# EAGLE board Sensor8535 - eagle (EAGLE 4.09)
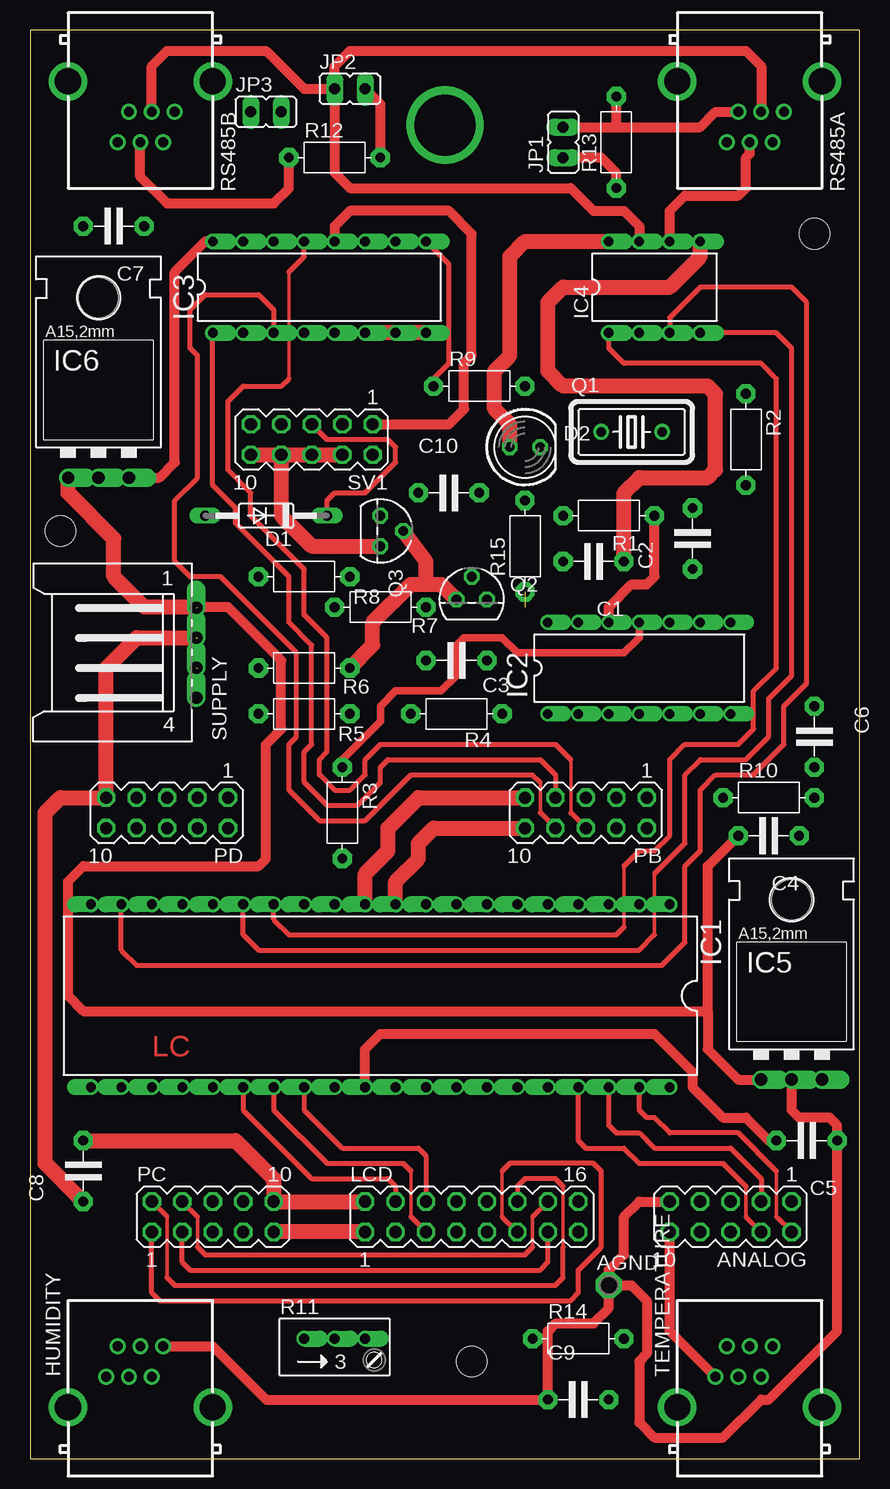
[diagram p0: board, top side]
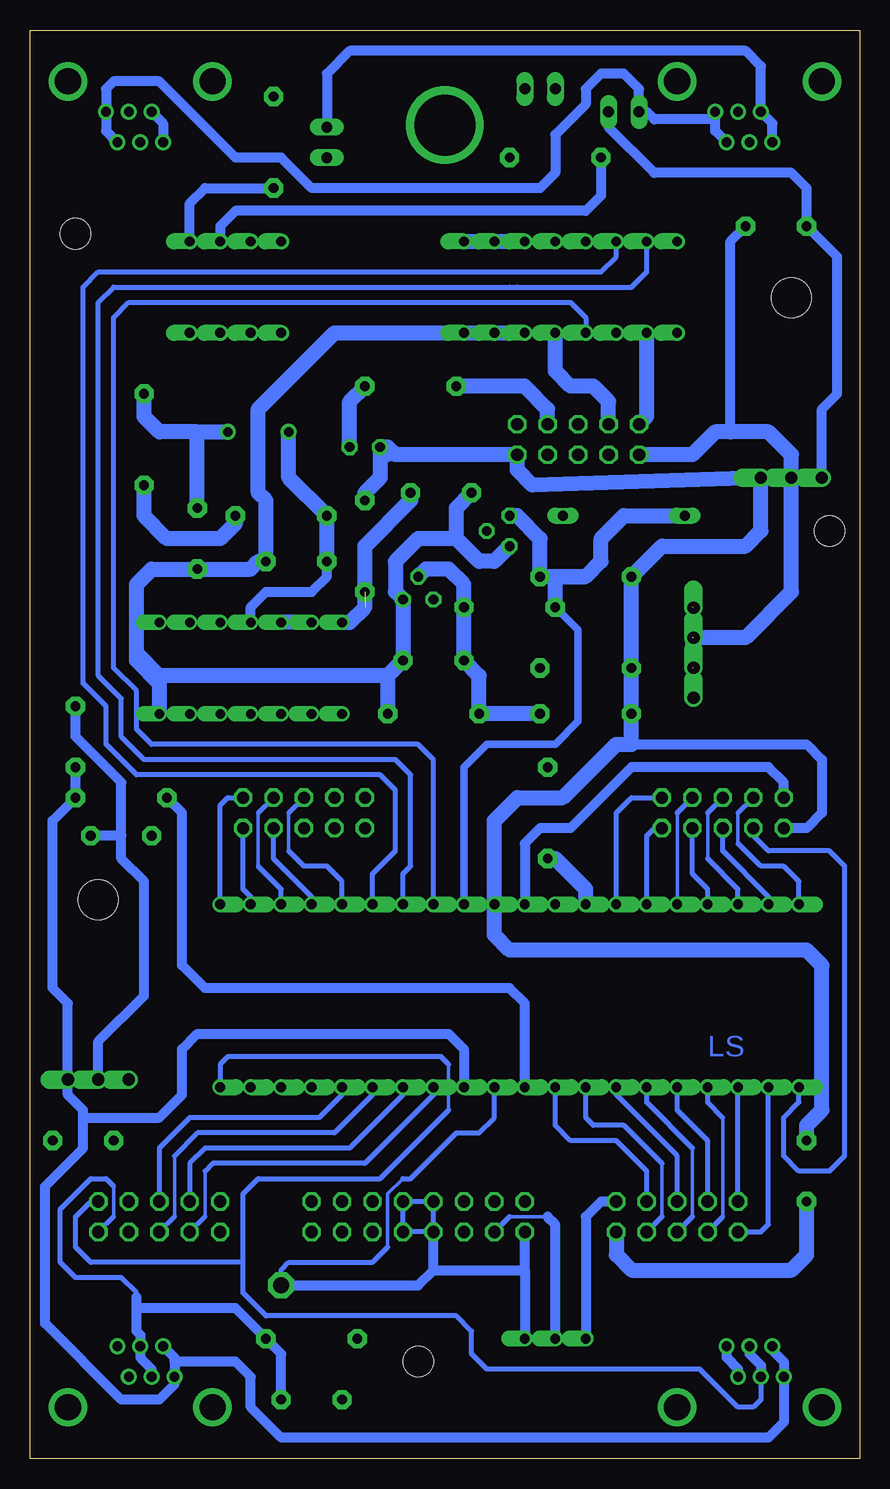
[diagram p1: board, bottom side, seen from below]

Size 69.2 x 119.05 mm. Coordinates in mm from the lower left corner, seen from the top.
Outline: 0,0 69.2,0 69.2,119.05 0,119.05 0,0
Copper layers used: Top, Bottom
Holes 2.54 mm at 2.54,77.31 36.83,8.09 65.4,102.07

## Footprints (pad centres in the part's own frame; a part is rotated, then mirrored left to right if it is on the bottom)
P1-13 = drill 1.321 pad 2.159 octagon: 1 0,0
MA05-2 = drill 1.016 octagon: 1 -5.08,-1.27; 2 -5.08,1.27; 3 -2.54,-1.27; 4 -2.54,1.27; 5 0,-1.27; 6 0,1.27; 7 2.54,-1.27; 8 2.54,1.27; 9 5.08,-1.27; 10 5.08,1.27
C-5 = drill 0.813 pad 1.6 octagon: 1 -2.54,0; 2 2.54,0
DO35-10 = drill 0.813 long: A 5.08,0; C -5.08,0
LED5MM = drill 0.813 octagon: A -1.27,0; K 1.27,0
RJ11V = drill 0.813 pad 1.27 round: 1 -5.08,0.635; 2 -2.54,-0.318; 3 -5.08,-1.27; 4 -2.54,-2.223; 5 -5.08,-3.175; 6 -2.54,-4.128 | drill 2.184 pad 2.54 round: P$1 -7.62,3.81; P$3 -7.62,-8.255
DIL40 = drill 0.813 offset: 1 -24.13,-7.62; 2 -21.59,-7.62; 3 -19.05,-7.62; 4 -16.51,-7.62; 5 -13.97,-7.62; 6 -11.43,-7.62; 7 -8.89,-7.62; 8 -6.35,-7.62; 9 -3.81,-7.62; 10 -1.27,-7.62; 11 1.27,-7.62; 12 3.81,-7.62; 13 6.35,-7.62; 14 8.89,-7.62; 15 11.43,-7.62; 16 13.97,-7.62; 17 16.51,-7.62; 18 19.05,-7.62; 19 21.59,-7.62; 20 24.13,-7.62; 21 24.13,7.62; 22 21.59,7.62; 23 19.05,7.62; 24 16.51,7.62; 25 13.97,7.62; 26 11.43,7.62; 27 8.89,7.62; 28 6.35,7.62; 29 3.81,7.62; 30 1.27,7.62; 31 -1.27,7.62; 32 -3.81,7.62; 33 -6.35,7.62; 34 -8.89,7.62; 35 -11.43,7.62; 36 -13.97,7.62; 37 -16.51,7.62; 38 -19.05,7.62; 39 -21.59,7.62; 40 -24.13,7.62
DIL14 = drill 0.8 offset: 1 -7.62,-3.81; 2 -5.08,-3.81; 3 -2.54,-3.81; 4 0,-3.81; 5 2.54,-3.81; 6 5.08,-3.81; 7 7.62,-3.81; 8 7.62,3.81; 9 5.08,3.81; 10 2.54,3.81; 11 0,3.81; 12 -2.54,3.81; 13 -5.08,3.81; 14 -7.62,3.81
DIL16 = drill 0.813 offset: 1 -8.89,-3.81; 2 -6.35,-3.81; 3 -3.81,-3.81; 4 -1.27,-3.81; 5 1.27,-3.81; 6 3.81,-3.81; 7 6.35,-3.81; 8 8.89,-3.81; 9 8.89,3.81; 10 6.35,3.81; 11 3.81,3.81; 12 1.27,3.81; 13 -1.27,3.81; 14 -3.81,3.81; 15 -6.35,3.81; 16 -8.89,3.81
DIL08 = drill 0.813 offset: 1 -3.81,-3.81; 2 -1.27,-3.81; 3 1.27,-3.81; 4 3.81,-3.81; 5 3.81,3.81; 6 1.27,3.81; 7 -1.27,3.81; 8 -3.81,3.81
78XXL = drill 1.016 offset: GND 0,-3.81; IN -2.54,-3.81; OUT 2.54,-3.81 | hole 3.302: 0,11.176
JP1 = drill 0.914 long: 1 0,-1.27; 2 0,1.27
MA08-2 = drill 1.016 octagon: 1 -8.89,-1.27; 2 -8.89,1.27; 3 -6.35,-1.27; 4 -6.35,1.27; 5 -3.81,-1.27; 6 -3.81,1.27; 7 -1.27,-1.27; 8 -1.27,1.27; 9 1.27,-1.27; 10 1.27,1.27; 11 3.81,-1.27; 12 3.81,1.27; 13 6.35,-1.27; 14 6.35,1.27; 15 8.89,-1.27; 16 8.89,1.27
HC18U-V = drill 0.813 round: 1 -2.54,0; 2 2.54,0
TO92 = drill 0.813 octagon: 1 1.27,0; 2 0,1.905; 3 -1.27,0
R-7,5 = drill 0.813 pad 1.6 octagon: 1 -3.81,0; 2 3.81,0
RJ9W = drill 0.813 offset: A 2.54,0.635; E -2.54,0.635; S 0,0.635
L04P = drill 1.016 offset: 1 3.75,-6.25; 2 1.25,-6.25; 3 -1.25,-6.25; 4 -3.75,-6.25

## Placement (x,y rotation side)
AGND  P1-13  [P1-13]  48.26,14.44 0 top
ANALOG  [MA05-2]  58.42,20.16 180 top
C1  27pF  [C-5]  46.99,74.77 180 top
C2  150pF  [C-5]  55.24,76.67 90 top
C3  100nF  [C-5]  35.56,66.51 180 top
C4  220nF  [C-5]  61.59,51.91 180 top
C5  220nF  [C-5]  64.77,26.51 180 top
C6  100nF  [C-5]  65.4,60.16 270 top
C7  220nF  [C-5]  6.98,102.7 180 top
C8  470nF  [C-5]  4.44,23.96 90 top
C9  470nF  [C-5]  45.72,4.92 0 top
C10  470nF  [C-5]  34.92,80.48 0 top
D1  1N4148  [DO35-10]  19.68,78.58 180 top
D2  [LED5MM]  41.27,84.29 0 top
HUMIDITY  RJ11V  [RJ11V]  6.98,11.9 90 top
IC1  AT90S8535P  [DIL40]  29.2,38.57 180 top
IC2  74AS00N  [DIL14]  50.8,65.88 0 top
IC3  4053N  [DIL16]  24.12,97.62 0 top
IC4  MAX481CPA  [DIL08]  52.07,97.62 0 top
IC5  LM340T05  [78XXL]  63.5,35.4 0 top
IC6  LM340T05  [78XXL]  5.71,85.56 0 top
JP1  [JP1]  44.45,109.69 0 top
JP2  [JP1]  26.66,114.14 270 top
JP3  [JP1]  19.68,112.23 270 top
LCD  [MA08-2]  36.83,20.16 0 top
PB  [MA05-2]  46.35,53.81 180 top
PC  [MA05-2]  15.23,20.16 0 top
PD  [MA05-2]  11.43,53.81 180 top
Q1  4MHz  [HC18U-V]  50.16,85.56 0 top
Q2  BC337  [TO92]  36.83,71.59 0 top
Q3  BC337  [TO92]  29.2,77.31 270 top
R1  82k  [R-7,5]  48.26,78.58 180 top
R2  2k  [R-7,5]  59.69,84.92 270 top
R3  100  [R-7,5]  26.03,53.81 270 top
R4  6.8k  [R-7,5]  35.56,62.06 0 top
R5  43k  [R-7,5]  22.86,62.06 180 top
R6  10k  [R-7,5]  22.86,65.88 180 top
R7  1M  [R-7,5]  29.2,70.95 0 top
R8  10k  [R-7,5]  22.86,73.5 180 top
R9  150  [R-7,5]  37.46,89.37 0 top
R10  33k  [R-7,5]  61.59,55.08 0 top
R11  TRIM_EU-RJ9W  [RJ9W]  25.39,9.36 0 top
R12  120  [R-7,5]  25.39,108.42 0 top
R13  100  [R-7,5]  48.89,109.69 90 top
R14  [R-7,5]  45.72,10 0 top
R15  120  [R-7,5]  41.27,76.04 90 top
RS485A  [RJ11V]  62.23,107.15 270 top
RS485B  RJ11V  [RJ11V]  11.43,107.15 270 top
SUPPLY  [L04P]  7.62,67.15 90 top
SV1  ISP  [MA05-2]  23.49,84.92 180 top
TEMPERATURE  RJ11V  [RJ11V]  57.78,11.9 90 top

## Library data of the parts
AGND = testpad
ANALOG LCD PB PC PD SV1 = con-lstb
C1-C10 R1-R10 R12-R15 = discrete
D1 = diode
D2 = led
HUMIDITY RS485A RS485B TEMPERATURE = con-rj
IC1 = atmel
IC2 = 74xx-eu
IC3 = 40xx
IC4 = maxim
IC5 IC6 = v-reg
JP1-JP3 = jumper
Q1 = crystal
Q2 Q3 = transistor-npn
R11 = pot
SUPPLY = con-amp-mt

## Nets
(MISO)PB6: IC1.7 IC3.15
(MOSI)PB5: IC1.6 IC3.14
(SCK)PB7: IC1.8 IC3.4
+5V: C8.2 D2.A IC1.10 IC3.16 IC4.8 IC6.OUT LCD.2 PB.10 PC.10 PD.10 R5.2 R6.2 R8.2 R11.E R15.2 SV1.2
A: IC4.6 R12.1 RS485A.4 RS485B.4
ADC0: ANALOG.1 HUMIDITY.3 HUMIDITY.4 IC1.40
ADC1: ANALOG.2 C9.2 IC1.39 R14.2 TEMPERATURE.3 TEMPERATURE.4
ADC2: ANALOG.3 IC1.38
ADC3: ANALOG.4 IC1.37
ADC4: ANALOG.5 IC1.36
ADC5: ANALOG.6 IC1.35
ADC6: ANALOG.7 IC1.34
ADC7: ANALOG.8 IC1.33
AREF: ANALOG.10 C6.2 HUMIDITY.1 HUMIDITY.2 IC1.32 IC5.OUT R10.2 TEMPERATURE.1 TEMPERATURE.2
AVCC: C5.2 IC1.30 R10.1
B: IC4.7 JP2.1 RS485A.3 RS485B.3
CLK: IC1.13 R3.2
LED_ENABLE: IC3.9 IC3.10 IC3.11 R9.1 SV1.3
MISO: IC3.2 SV1.9
MOSI: IC3.12 SV1.1
N$1: IC2.12 IC2.13 R1.1 R2.2
N$3: LCD.3 R11.S
N$4: C2.2 Q1.2 R2.1
N$5: D2.K R9.2
N$6: C1.2 IC2.11 Q1.1 R1.2 R3.1
N$7: Q2.3 Q3.2 R6.1
N$9: C3.2 Q2.2 R4.1 R5.1 R7.2
N$11: JP2.2 R12.2
P-RESET: D1.C SV1.5
PB0: IC1.1 PB.1
PB1: IC1.2 PB.2
PB2: IC1.3 PB.3
PB3: IC1.4 PB.4
PB4: IC1.5 PB.5
PB5: IC3.13 PB.6
PB6: IC3.1 PB.7
PB7: IC3.3 PB.8
PC0: IC1.22 LCD.11 PC.1
PC1: IC1.23 LCD.12 PC.2
PC2: IC1.24 LCD.13 PC.3
PC3: IC1.25 LCD.14 PC.4
PC4: IC1.26 LCD.4 PC.5
PC5: IC1.27 LCD.5 PC.6
PC6: IC1.28 LCD.6 PC.7
PC7: IC1.29 PC.8
PD0: IC1.14 IC4.1 PD.1
PD1: IC1.15 IC4.4 PD.2
PD2: IC1.16 PD.3
PD3: IC1.17 PD.4
PD4: IC1.18 PD.5
PD5: IC1.19 IC4.2 IC4.3 PD.6
PD6: IC1.20 PD.7
PD7: IC1.21 PD.8
PE: AGND.1 ANALOG.9 C1.1 C2.1 C3.1 C4.1 C5.1 C6.1 C7.1 C8.1 C9.1 C10.1 HUMIDITY.5 HUMIDITY.6 IC1.11 IC1.31 IC2.7 IC3.6 IC3.7 IC3.8 IC4.5 IC5.GND IC6.GND JP1.1 LCD.1 LCD.7 LCD.8 LCD.9 LCD.10 PB.9 PC.9 PD.9 Q2.1 Q3.1 R4.2 R11.A R13.1 R14.1 SUPPLY.2 SUPPLY.3 SV1.4 SV1.6 SV1.8 SV1.10
RST: D1.A IC1.9 Q3.3 R7.1 R8.1
RSVCC: JP3.1 RS485A.1 RS485A.2 RS485B.1 RS485B.2
RTN: JP1.2 R13.2 RS485A.5 RS485A.6 RS485B.5 RS485B.6
SCK: IC3.5 SV1.7
VCC: C4.2 C7.2 IC5.IN IC6.IN JP3.2 SUPPLY.1
VCUT: C10.2 IC2.14 R15.1

## Tracks (layer width: path | path; a pad name or v marks a point on that pad's centre or on a via)
(MISO)PB6
  Bottom 0.406: IC1.7 38.1,48.73 37.46,49.37 37.46,56.98 38.73,58.26 59.69,58.26 61.59,60.16 61.59,63.34 63.5,65.24 63.5,96.36 62.23,97.62 29.2,97.62 | 29.2,97.62 28.57,97.62 | 29.2,97.62 19.04,97.62 17.77,98.89 IC3.15
(MOSI)PB5
  Bottom 0.406: IC1.6 40.64,48.73 38.73,50.64 38.73,55.72 40,56.98 60.32,56.98 62.86,59.52 62.86,62.7 64.77,64.61 64.77,97.62 63.5,98.89 21.59,98.89 20.32,100.17 IC3.14
(SCK)PB7
  Bottom 0.406: IC1.8 35.56,58.26 36.83,59.52 59.05,59.52 60.32,60.8 60.32,63.97 62.23,65.88 62.23,95.09 60.96,96.36 24.12,96.36 22.86,95.09 IC3.4
+5V  (1 unrouted)
  Top 0.813: IC6.OUT 10.79,81.75 12.06,83.02 12.06,98.89 14.6,101.44 IC3.16
  Top 1.27: PB.10 33.65,52.54 32.38,51.27 32.38,50 30.47,48.09 IC1.10 | D2.A 40,86.2 38.73,87.47 38.73,90.64 40,91.91 40,100.17 41.27,101.44 IC4.8 | LCD.2 PC.10 20.32,23.33 17.14,26.51 C8.2
  Bottom 0.813: R11.E 22.86,20.16 21.59,21.43 PC.10 | PD.10 4.44,52.54 3.17,53.81 3.17,58.26 4.44,59.52 19.04,59.52
  Bottom 1.27: R5.2 R6.2 | R6.2 R8.2 16.5,76.03 9.52,76.03 8.25,77.31 IC6.OUT 27.3,81.12 28.57,82.38 SV1.2 38.73,83.66 39.37,84.29 D2.A | R5.2 R6.2 | C8.2 4.44,27.78 3.17,29.05 3.17,41.11 4.44,42.38 29.2,42.38 30.47,43.65 IC1.10 30.47,53.18 28.57,55.08 24.76,55.08 20.32,59.52 19.04,59.52 R5.2 | 40,83.66 40,81.75 | D2.A 40,83.66 | 40,83.66 39.37,83.66 | D2.A 40,81.75 | 40,81.75 41.27,80.48 R15.2
A
  Top 0.813: RS485B.4 9.2,106.83 11.43,104.61 20.32,104.61 21.59,105.88 R12.1 | RS485A.4 60,108.74 59.69,108.42 59.69,105.88 59.05,105.25 54.61,105.25 53.34,103.97 IC4.6
  Bottom 0.813: R12.1 21.59,105.25 22.86,103.97 52.07,103.97 53.34,102.7 IC4.6
ADC0
  Bottom 0.305: 34.29,29.05 34.29,32.86
  Bottom 0.406: ANALOG.1 64.13,21.43 65.4,20.16 65.4,17.62 64.13,16.35 51.43,16.35 | 51.43,16.35 51.43,22.06 50.16,23.33 40,23.33 34.29,29.05 | 34.29,32.86 34.92,33.49 52.7,33.49 53.34,32.86 IC1.40 | HUMIDITY.3 8.25,4.92 8.88,4.28 10.15,4.28 13.33,7.46 31.11,7.46 32.38,8.73 32.38,10.63 33.65,11.9 49.53,11.9 51.43,13.81 51.43,16.35
  Bottom 0.813: HUMIDITY.3 8.25,7.77 9.2,8.73 HUMIDITY.4
ADC1
  Top 0.305: 62.23,20.16 62.23,23.96
  Top 0.406: ANALOG.2 62.23,20.16 | 62.23,23.96 59.05,27.14 53.34,27.14 52.07,28.41 51.43,28.41 50.8,29.05 IC1.39
  Bottom 0.305: 62.23,22.7 62.23,20.16
  Bottom 0.406: 62.23,20.16 ANALOG.2 | 62.23,22.7 62.86,23.33 64.13,23.33 66.67,20.79 66.67,16.35 65.4,15.08 61.59,15.08 60.32,13.81 60.32,13.49 60.32,12.54 60.32,10.63
  Bottom 0.813: C9.2 48.26,8.73 R14.2 52.07,12.54 60.32,12.54 | 60.32,13.49 60.32,10.63 60,10.31 TEMPERATURE.4 60,8.41 59.05,7.46 TEMPERATURE.3
ADC2
  Top 0.406: ANALOG.3 60.96,23.33 58.42,25.87 52.07,25.87 50.8,27.14 48.89,27.14 48.26,27.78 IC1.38
ADC3
  Top 0.305: 59.69,22.7 59.69,20.16
  Top 0.406: 59.69,20.16 ANALOG.4 | 59.69,22.7 57.78,24.6 50.8,24.6 49.53,25.87 46.35,25.87 45.72,26.51 IC1.37
ADC4
  Bottom 0.406: ANALOG.5 58.42,25.87 55.88,28.41 45.08,28.41 43.18,30.32 IC1.36
ADC5
  Bottom 0.305: 57.15,25.23 57.15,20.16
  Bottom 0.406: 57.15,20.16 ANALOG.6 | 57.15,25.23 55.24,27.14 43.81,27.14 40.64,30.32 IC1.35
ADC6
  Bottom 0.406: ANALOG.7 55.88,24.6 54.61,25.87 42.54,25.87 38.1,30.32 IC1.34
ADC7
  Bottom 0.305: 54.61,23.96 54.61,20.16
  Bottom 0.406: 54.61,20.16 ANALOG.8 | 54.61,23.96 53.97,24.6 41.27,24.6 35.56,30.32 IC1.33
AREF
  Top 0.813: ANALOG.10 53.34,10.63 TEMPERATURE.1
  Bottom 0.813: 64.77,28.41 58.42,28.41 56.51,30.32 56.51,34.12 55.24,35.4 34.29,35.4 33.02,34.12 IC1.32 | HUMIDITY.2 7.3,9.04 6.35,8.09 HUMIDITY.1 6.35,3.01 7.62,1.74 48.26,1.74 50.8,4.28 50.8,6.82 52.07,8.09 57.15,8.09 | 57.15,8.09 TEMPERATURE.1 57.15,6.19 58.42,4.92 61.59,4.92 67.94,11.27 67.94,22.7 64.77,25.87 64.77,28.41 | 57.15,8.09 57.15,8.41 TEMPERATURE.2 | 64.77,28.41 64.77,29.05 66.03,30.32 IC5.OUT 66.03,37.94 67.31,39.2 67.31,53.18 R10.2 C6.2
AVCC
  Top 0.813: C5.2 61.59,26.51 59.69,28.41 57.78,28.41 55.24,30.95 55.24,32.22 52.07,35.4 29.2,35.4 27.93,34.12 IC1.30
  Bottom 0.813: 56.51,49.37 56.51,41.11 54.61,39.2 29.2,39.2 27.93,37.94 IC1.30 | 56.51,49.37 56.51,50.64 | 56.51,49.37 56.51,53.81 R10.1
B
  Top 0.813: RS485B.3 10.15,116.04 11.43,117.31 19.68,117.31 22.86,114.14 JP2.1 | JP2.1 25.39,107.15 26.66,105.88 45.08,105.88 46.99,103.97 49.53,103.97 50.8,102.7 IC4.7 | JP2.1 25.39,116.04 26.66,117.31 59.69,117.31 60.96,116.04 RS485A.3
CLK
  Bottom 1.27: IC1.13 22.86,47.46 25.39,50 R3.2
LED_ENABLE
  Top 0.406: R9.1 33.65,90 34.92,91.28 34.92,99.53 IC3.9 IC3.11
  Bottom 1.27: R9.1 27.93,89.37 26.03,87.47 SV1.3 | IC3.11 IC3.10 IC3.9
MISO
  Bottom 1.27: SV1.9 17.77,86.83 IC3.2
MOSI
  Top 0.813: SV1.1 34.92,86.2 36.19,87.47 36.19,91.28 36.83,91.91 36.83,102.07 34.92,103.97 26.66,103.97 25.39,102.7 IC3.12
N$1
  Top 0.813: IC2.12 48.26,70.95 50.16,72.86 51.43,72.86 52.07,73.5 R1.1
  Bottom 1.27: R1.1 52.07,77.94 53.34,76.67 57.78,76.67 59.69,78.58 R2.2 | IC2.13 IC2.12
N$2  (via drill 5.08 pad 6.45)
  other vias: 34.6,111.12
N$3
  Bottom 0.305: 26.03,20.16 29.2,20.16
  Bottom 0.406: 29.2,20.16 LCD.3
  Bottom 0.813: R11.S 25.39,19.52 26.03,20.16
N$4
  Bottom 1.27: 55.24,85.56 Q1.2 | R2.1 59.69,86.83 58.42,85.56 55.24,85.56 | C2.2 55.24,85.56
N$5
  Bottom 1.27: D2.K 42.54,88.1 R9.2
N$6
  Top 0.61: R3.1 26.03,58.26 29.2,61.43 29.2,62.7 30.47,63.97 34.29,63.97 35.56,65.24 35.56,67.15 35.56,67.78 36.19,68.41 39.37,68.41 40.64,67.15 49.53,67.15 50.8,68.41 IC2.11
  Bottom 0.813: IC2.11 50.8,70.95 49.53,72.22 45.72,72.22 44.45,73.5 C1.2
  Bottom 1.27: R1.2 C1.2 R1.2 | Q1.1 47.62,81.75 R1.2
N$7
  Top 1.27: R6.1 28.57,67.78 28.57,69.69 31.75,72.86 33.02,72.86 | 33.02,72.86 33.02,74.77 Q3.2 | 33.02,72.86 34.29,72.86 Q2.3
N$9
  Bottom 1.27: R5.1 R4.1 31.75,65.24 C3.2 R7.2 33.02,72.86 34.29,74.13 36.19,74.13 Q2.2
N$11
  Top 0.813: R12.2 29.2,112.86 JP2.2
P-RESET
  Top 0.406: D1.C 24.76,79.84 25.39,80.48 27.93,80.48 30.47,83.02 30.47,84.29 29.84,84.92 24.76,84.92 SV1.5
PB0
  Bottom 0.406: PB.1 52.7,55.08 53.34,54.45 IC1.1
PB1
  Bottom 0.406: IC1.2 50.8,46.83 51.43,47.46 PB.2
PB2
  Bottom 0.305: 50.16,49.37 50.16,53.81
  Bottom 0.406: 50.16,53.81 PB.3 | 50.16,49.37 48.26,47.46 IC1.3
PB3
  Bottom 0.406: PB.4 48.89,50 45.72,46.83 IC1.4
PB4
  Bottom 0.305: 47.62,50.64 47.62,53.81
  Bottom 0.406: 47.62,53.81 PB.5 | 47.62,50.64 46.35,49.37 44.45,49.37 43.18,48.09 IC1.5
PB5
  Top 0.305: 45.08,58.26 45.08,53.81 | 21.59,90 21.59,98.89
  Top 0.406: 45.08,53.81 PB.6 | 45.08,58.26 43.81,59.52 29.84,59.52 | 29.84,59.52 31.11,59.52 | 29.84,59.52 29.2,59.52 27.93,58.26 27.93,56.98 26.66,55.72 25.39,55.72 24.12,56.98 24.12,58.26 24.76,58.89 24.76,68.41 22.86,70.32 22.86,74.13 18.41,78.58 18.41,80.48 16.5,82.38 16.5,88.1 17.77,89.37 20.95,89.37 21.59,90 | 21.59,98.89 22.86,100.17 IC3.13
PB6
  Top 0.406: PB.7 43.81,56.98 42.54,58.26 29.84,58.26 29.2,57.62 29.2,56.35 27.3,54.45 24.76,54.45 22.86,56.35 22.86,58.89 23.49,59.52 23.49,67.78 21.59,69.69 21.59,73.5 17.14,77.94 17.14,79.21 15.23,81.12 IC3.1
PB7
  Top 0.305: 42.54,56.35 42.54,53.81
  Top 0.406: 42.54,53.81 PB.8 | 42.54,56.35 41.91,56.98 31.75,56.98 27.93,53.18 24.12,53.18 21.59,55.72 21.59,59.52 22.22,60.16 22.22,67.15 15.87,73.5 13.33,73.5 12.06,74.77 12.06,79.84 13.96,81.75 13.96,91.91 13.33,92.55 13.33,95.72 14.6,96.99 19.04,96.99 20.32,95.72 IC3.3
PC0
  Top 0.305: 39.37,23.96 39.37,20.16
  Top 0.406: PC.1 10.15,13.81 10.79,13.17 45.08,13.17 45.72,13.81 45.72,15.71 47.62,17.62 47.62,23.96 46.99,24.6 40,24.6 39.37,23.96 | 39.37,20.16 LCD.11
  Bottom 0.406: PC.1 8.25,18.89 7.62,19.52 IC1.22
PC1
  Top 0.305: 44.45,17.62 44.45,22.7 | 11.43,15.08 11.43,20.16
  Top 0.406: LCD.12 40.64,22.7 41.27,23.33 43.81,23.33 44.45,22.7 | 11.43,15.08 12.06,14.44 43.81,14.44 44.45,15.08 44.45,17.62 | 11.43,20.16 PC.2
  Bottom 0.406: PC.2 IC1.23
PC2
  Top 0.406: LCD.13 43.18,16.35 42.54,15.71 13.33,15.71 12.7,16.35 PC.3
  Bottom 0.305: 11.43,20.16 11.43,28.41
  Bottom 0.406: PC.3 11.43,20.16 | 11.43,28.41 12.7,29.68 IC1.24
PC3
  Top 0.305: 41.91,17.62 41.91,20.16 | 13.96,20.16 13.96,17.62
  Top 0.406: 41.91,20.16 LCD.14 | 41.91,17.62 41.27,16.98 14.6,16.98 13.96,17.62 | PC.4 13.96,20.16
  Bottom 0.406: PC.4 12.7,26.51 15.23,29.05 IC1.25
PC4
  Top 0.406: LCD.4 30.47,22.7 29.84,23.33 23.49,23.33 17.77,29.05 IC1.26
  Bottom 0.305: 13.96,20.16 13.96,25.87
  Bottom 0.406: PC.5 13.96,20.16 | 13.96,25.87 17.77,29.68 IC1.26
PC5
  Top 0.305: 31.75,23.96 31.75,20.16
  Top 0.406: 31.75,20.16 LCD.5 | 31.75,23.96 31.11,24.6 24.76,24.6 20.32,29.05 IC1.27
  Bottom 0.406: PC.6 15.23,25.23 20.32,30.32 IC1.27
PC6
  Top 0.406: LCD.6 33.02,25.23 32.38,25.87 26.03,25.87 22.86,29.05 IC1.28
  Bottom 0.305: 16.5,20.16 16.5,24.6
  Bottom 0.406: PC.7 16.5,20.16 | 16.5,24.6 19.68,27.78 22.22,27.78 22.86,28.41 IC1.28
PC7
  Bottom 0.406: PC.8 17.77,23.96 20.32,26.51 24.12,26.51 25.39,27.78 IC1.29
PD0
  Top 0.305: 49.53,44.28 49.53,49.37
  Top 0.406: IC4.1 48.26,92.55 49.53,91.28 60.96,91.28 62.23,90 62.23,65.88 60.32,63.97 60.32,60.8 59.05,59.52 54.61,59.52 53.34,58.26 53.34,51.91 52.07,50.64 50.8,50.64 49.53,49.37 | 49.53,44.28 48.89,43.65 21.59,43.65 20.32,44.92 IC1.14
  Bottom 0.406: PD.1 19.04,55.08 20.32,53.81 IC1.14
PD1
  Top 0.305: 52.07,43.65 52.07,48.73
  Top 0.406: IC4.4 62.23,93.81 63.5,92.55 63.5,65.24 61.59,63.34 61.59,60.16 59.69,58.26 55.88,58.26 54.61,56.98 54.61,51.27 52.07,48.73 | 52.07,43.65 50.8,42.38 19.04,42.38 17.77,43.65 IC1.15
  Bottom 0.406: IC1.15 17.77,51.91 17.14,52.54 PD.2
PD2
  Bottom 0.305: IC1.16 15.23,53.81
  Bottom 0.406: 15.23,53.81 PD.3
PD3
  Bottom 0.406: IC1.17 12.7,47.46 13.96,48.73 PD.4
PD4
  Bottom 0.305: 12.7,50 12.7,53.81
  Bottom 0.406: 12.7,53.81 PD.5 | 12.7,50 10.15,47.46 IC1.18
PD5
  Top 0.406: IC4.2 IC4.3 53.34,95.09 55.88,97.62 63.5,97.62 64.77,96.36 64.77,64.61 62.86,62.7 62.86,59.52 60.32,56.98 57.15,56.98 55.88,55.72 55.88,50.64 54.61,49.37 54.61,43.02 52.7,41.11 8.88,41.11 7.62,42.38 IC1.19
  Bottom 0.406: PD.6 11.43,50.64 7.62,46.83 IC1.19
PD6
  Bottom 0.305: 10.15,51.27 10.15,53.81
  Bottom 0.406: 10.15,53.81 PD.7 | 10.15,51.27 8.25,49.37 6.35,49.37 5.08,48.09 IC1.20
PD7
  Bottom 0.406: PD.8 8.88,51.91 7.62,50.64 2.54,50.64 1.26,49.37 1.26,25.23 2.54,23.96 5.08,23.96 6.35,25.23 6.35,28.41 5.08,29.68 IC1.21
PE  (4 unrouted)
  Top 0.813: IC5.GND 63.5,29.05 64.13,28.41 66.67,28.41 67.31,27.78 C5.1 67.31,10.63 61.59,4.92 60.96,4.92 57.78,1.74 52.07,1.74 50.8,3.01 50.8,8.09 51.43,8.73 51.43,13.17 50.16,14.44 AGND.1 | 43.18,10 C9.1 19.68,4.92 15.23,9.36 HUMIDITY.6 | 43.18,10 R14.1 | AGND.1 48.26,15.71 49.53,16.98 49.53,20.16 50.8,21.43 ANALOG.9 | 43.18,10 43.18,10.63 43.81,11.27 46.99,11.27 48.26,12.54 AGND.1 | JP1.1 47.62,108.42 48.89,107.15 R13.1
  Top 1.27: SV1.4 SV1.6 SV1.8 | SV1.10 SV1.8 | IC3.8 IC3.6 | Q3.1 23.49,76.03 20.95,78.58 SV1.8 | PB.9 32.38,55.08 29.84,52.54 29.84,50.64 27.93,48.73 IC1.11 | IC4.5 55.88,100.17 53.34,97.62 44.45,97.62 43.18,96.36 43.18,90.64 44.45,89.37 56.51,89.37 57.15,88.73 57.15,82.38 56.51,81.75 50.8,81.75 49.53,80.48 C1.1 | LCD.1 PC.9 | C8.1 1.26,24.6 1.26,53.81 2.54,55.08 PD.9 6.35,65.88 8.88,68.41 13.96,68.41
  Bottom 0.305: 38.1,23.33 39.37,22.06 39.37,17.62
  Bottom 0.406: IC1.31 30.47,28.41 31.75,27.14 33.65,27.14 37.46,23.33 38.1,23.33 | 39.37,17.62 40.64,16.35 47.62,16.35 48.26,15.71 AGND.1 | LCD.7 LCD.9 LCD.10 LCD.8 LCD.7
  Bottom 0.813: 35.56,15.71 27.93,15.71 | 35.56,15.71 LCD.7 | C6.1 65.4,60.16 61.59,56.35 61.59,51.91 | 61.59,51.91 61.59,50 59.69,48.09 59.69,38.57 63.5,34.76 IC5.GND | HUMIDITY.5 10.15,7.46 11.11,8.41 HUMIDITY.6 | 27.93,15.71 LCD.1 | 27.93,15.71 R11.A | 61.59,51.91 C4.1 | 10.79,85.56 10.79,101.44 C7.1 | IC1.11 27.93,51.27 26.66,52.54 24.12,52.54 19.04,57.62 7.62,57.62 6.35,56.35 PD.9 | AGND.1 36.83,14.44 35.56,15.71 | R13.1 54.61,105.88 55.88,104.61 IC4.5
  Bottom 1.27: 39.37,65.24 R4.2 | 39.37,65.24 C3.1 Q2.1 38.73,72.22 38.73,74.77 36.83,76.67 33.65,76.67 | 33.65,76.67 31.75,74.77 30.47,74.77 Q3.1 | IC3.6 IC3.7 IC3.8 43.81,93.81 50.16,87.47 50.16,80.48 49.53,79.84 C1.1 50.16,74.77 50.8,74.13 C2.1 59.05,74.13 60.32,72.86 60.32,67.15 | 13.96,65.88 13.96,68.41 9.52,68.41 5.71,72.22 IC6.GND 5.71,83.66 7.62,85.56 10.79,85.56 12.06,85.56 13.96,83.66 SV1.10 | 60.32,66.51 60.32,67.15 | 58.42,64.61 IC2.7 | 58.42,65.24 58.42,64.61 | 39.37,65.24 58.42,65.24 | 58.42,65.24 60.32,66.51 | 58.42,64.61 60.32,66.51 | 58.42,65.24 60.32,67.15 | C8.1 4.44,16.98 5.71,15.71 19.04,15.71 20.32,16.98 PC.9 | C10.1 33.65,79.21 33.65,76.67
RST
  Bottom 0.61: IC1.9 33.02,57.62 31.11,59.52 25.39,59.52 23.49,61.43 23.49,69.05 R7.1
  Bottom 1.27: R7.1 25.39,73.5 22.86,73.5 | D1.A 19.68,78.58 21.59,76.67 21.59,74.77 22.86,73.5 | 22.86,73.5 R8.1 26.66,76.67 28.57,78.58 Q3.3
RSVCC
  Bottom 0.813: 12.06,111.59 12.06,110.64 RS485B.2 | 12.06,111.59 RS485B.1 | RS485A.2 62.86,110.64 RS485A.1 62.86,114.14 62.23,114.77 58.42,114.77 52.07,108.42 48.26,108.42 45.72,105.88 26.66,105.88 25.39,107.15 25.39,110.33 22.86,112.86 22.86,114.14 21.59,115.41 19.68,115.41 18.41,114.14 JP3.1 17.77,112.23 17.14,111.59 12.06,111.59
RTN
  Top 0.813: JP1.2 48.89,110.96 | 48.89,110.96 R13.2 | RS485A.5 57.15,112.23 55.88,110.96 48.89,110.96
  Bottom 0.813: RS485B.6 7.3,111.28 RS485B.5 8.25,116.04 9.52,117.31 42.54,117.31 44.45,115.41 JP1.2 | RS485A.6 58.1,111.28 RS485A.5
SCK
  Bottom 1.27: IC3.5 25.39,90.64 24.12,89.37 22.22,89.37 20.95,88.1 SV1.7
VCC  (1 unrouted)
  Top 0.813: 56.51,37.3 4.44,37.3 3.17,38.57 3.17,48.09 4.44,49.37 19.04,49.37 19.68,50 19.68,59.52 20.95,60.8 20.95,66.51 16.5,70.95 13.96,70.95 | IC5.IN 59.05,31.59 56.51,34.12 56.51,37.3 | 56.51,37.3 56.51,49.37 C4.2
  Top 1.27: 13.96,70.95 9.52,70.95 6.98,73.5 6.98,76.67 3.17,80.48 IC6.IN
  Bottom 0.813: IC6.IN 3.17,87.47 1.9,88.73 1.9,100.17 C7.2 4.44,105.88 5.71,107.15 17.14,107.15 20.95,110.96 JP3.2
VCUT  (2 unrouted)
  Bottom 1.27: IC2.14 42.54,69.69 41.27,70.95 41.27,76.03 37.46,79.84 C10.2

## Text on the board
Top: LC
Bottom: LS